# EAGLE board PLACA_01 (EAGLE 9.6.2)
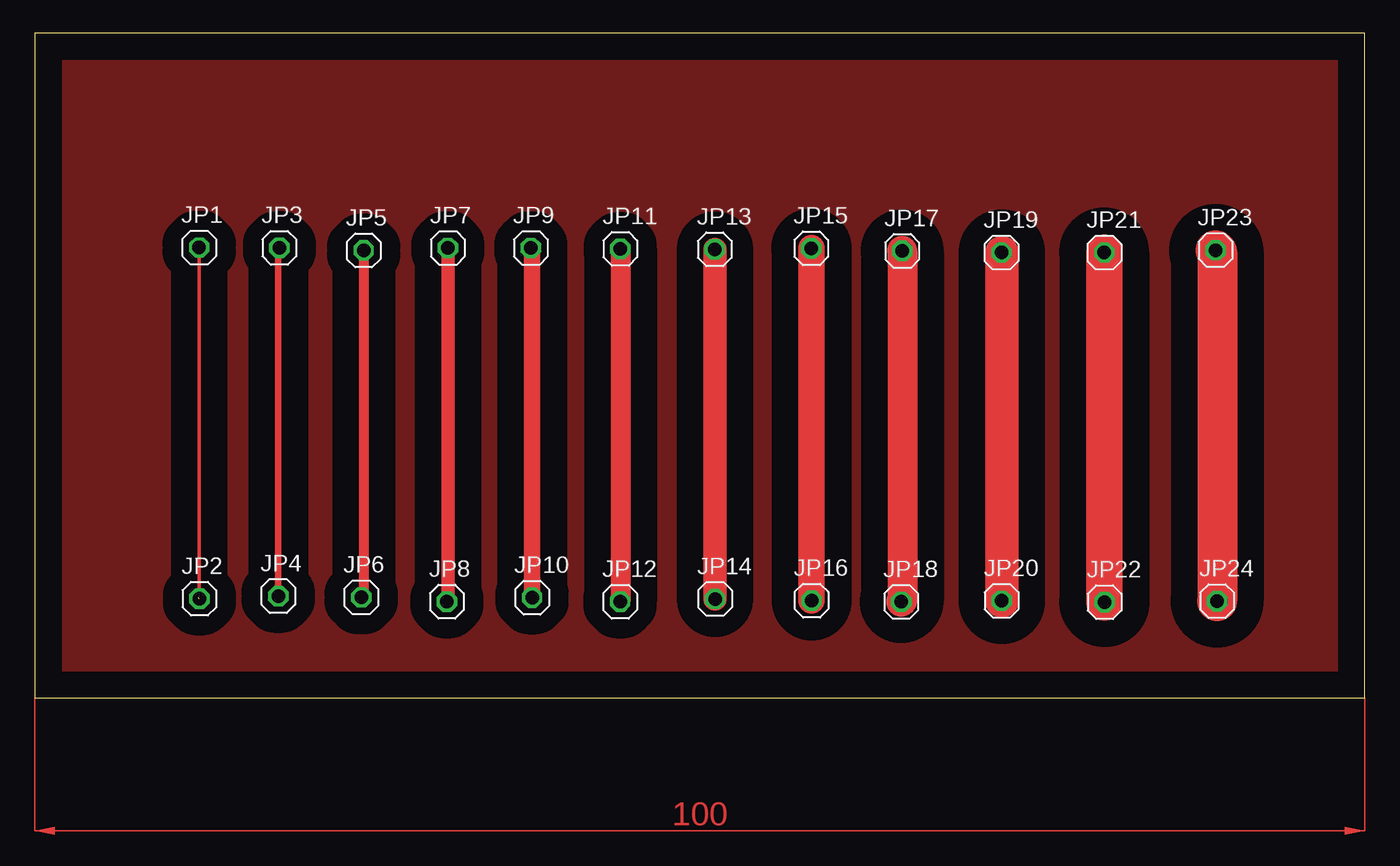
[diagram p0: board, top side]

Size 100 x 50 mm. Coordinates in mm from the lower left corner, seen from the top.
Outline: 0,0 100,0 100,50 0,50 0,0
Copper layers (1*16): Top 0.035mm / dielectric 1.5mm / Bottom 0.035mm
Design rules "default": minimum track width 6mil, minimum drill 0.35mm, track to track 6mil, track to pad 6mil, pad to pad 6mil, via to via 6mil, smd to smd 6mil, copper to edge 40mil, drill to drill 6mil, minimum pad ring 10mil, minimum via ring 8mil, stop-mask expansion 4mil, vias tented up to drill 0mil, thermal gap 10mil

## Footprints (pad centres in the part's own frame; a part is rotated, then mirrored left to right if it is on the bottom)
1X01 = drill 1.016 octagon: 1 0,0

## Placement (x,y rotation side)
JP1  [1X01]  12.35,33.88 0 top
JP2  [1X01]  12.37,7.46 0 top
JP3  [1X01]  18.38,33.86 0 top
JP4  [1X01]  18.3,7.66 0 top
JP5  [1X01]  24.72,33.66 0 top
JP6  [1X01]  24.54,7.56 0 top
JP7  [1X01]  31.06,33.84 0 top
JP8  [1X01]  30.98,7.24 0 top
JP9  [1X01]  37.3,33.84 0 top
JP10  [1X01]  37.39,7.54 0 top
JP11  [1X01]  44.03,33.78 0 top
JP12  [1X01]  44.01,7.24 0 top
JP13  [1X01]  51.13,33.74 0 top
JP14  [1X01]  51.15,7.44 0 top
JP15  [1X01]  58.39,33.82 0 top
JP16  [1X01]  58.41,7.32 0 top
JP17  [1X01]  65.23,33.62 0 top
JP18  [1X01]  65.15,7.22 0 top
JP19  [1X01]  72.69,33.5 0 top
JP20  [1X01]  72.71,7.3 0 top
JP21  [1X01]  80.43,33.5 0 top
JP22  [1X01]  80.45,7.2 0 top
JP23  [1X01]  88.79,33.68 0 top
JP24  [1X01]  88.91,7.28 0 top

## Library data of the parts
JP1-JP24 = pinhead

## Nets
N$1: JP1.1 JP2.1
N$2: JP3.1 JP4.1
N$3: JP5.1 JP6.1
N$4: JP7.1 JP8.1
N$5: JP9.1 JP10.1
N$6: JP11.1 JP12.1
N$7: JP13.1 JP14.1
N$8: JP15.1 JP16.1
N$9: JP17.1 JP18.1
N$10: JP19.1 JP20.1
N$11: JP21.1 JP22.1
N$12: JP23.1 JP24.1

## Tracks (layer width: path | path; a pad name or v marks a point on that pad's centre or on a via)
1
  pour Top (isolate 2): 0.6,49.5 0.66,1.3 99.06,1.3 99,49.5
N$1  (2 unrouted)
  Top 0.25: JP1.1 12.35,7.67 | 12.3,7.54 12.36,7.65
N$2
  Top 0.5: JP3.1 18.3,33.78 JP4.1
N$3
  Top 0.75: JP5.1 24.72,7.74 JP6.1
N$4
  Top 1: JP7.1 31.06,7.32 JP8.1
N$5
  Top 1.25: JP9.1 37.39,33.75 JP10.1
N$6
  Top 0.152: JP12.1 44.03,7.26
  Top 1.5: JP11.1 44.03,7.26
N$7
  Top 1.75: JP13.1 51.13,7.46 JP14.1
N$8
  Top 2: JP15.1 58.41,33.8 JP16.1
N$9
  Top 2.25: JP17.1 65.23,7.3 JP18.1
N$10
  Top 0.152: JP19.1 72.71,33.48
  Top 2.5: 72.71,33.48 JP20.1
N$11
  Top 2.75: JP21.1 80.43,7.22 JP22.1
N$12
  Top 3: JP23.1 88.91,33.56 JP24.1
(copper drawn outside any net)
  shapes: Top area x2